# Altium PCB Awtrix Finally.pcbdoc (part 2 of 4)
Units mil, origin at the board's own origin, x right, y up, seen from the top; angles counter-clockwise.
Board outline 8820 x 2812 mil, 2 copper layers (Top Layer, Bottom Layer); 513 components, 259 nets, 1543 pads, 743 vias.
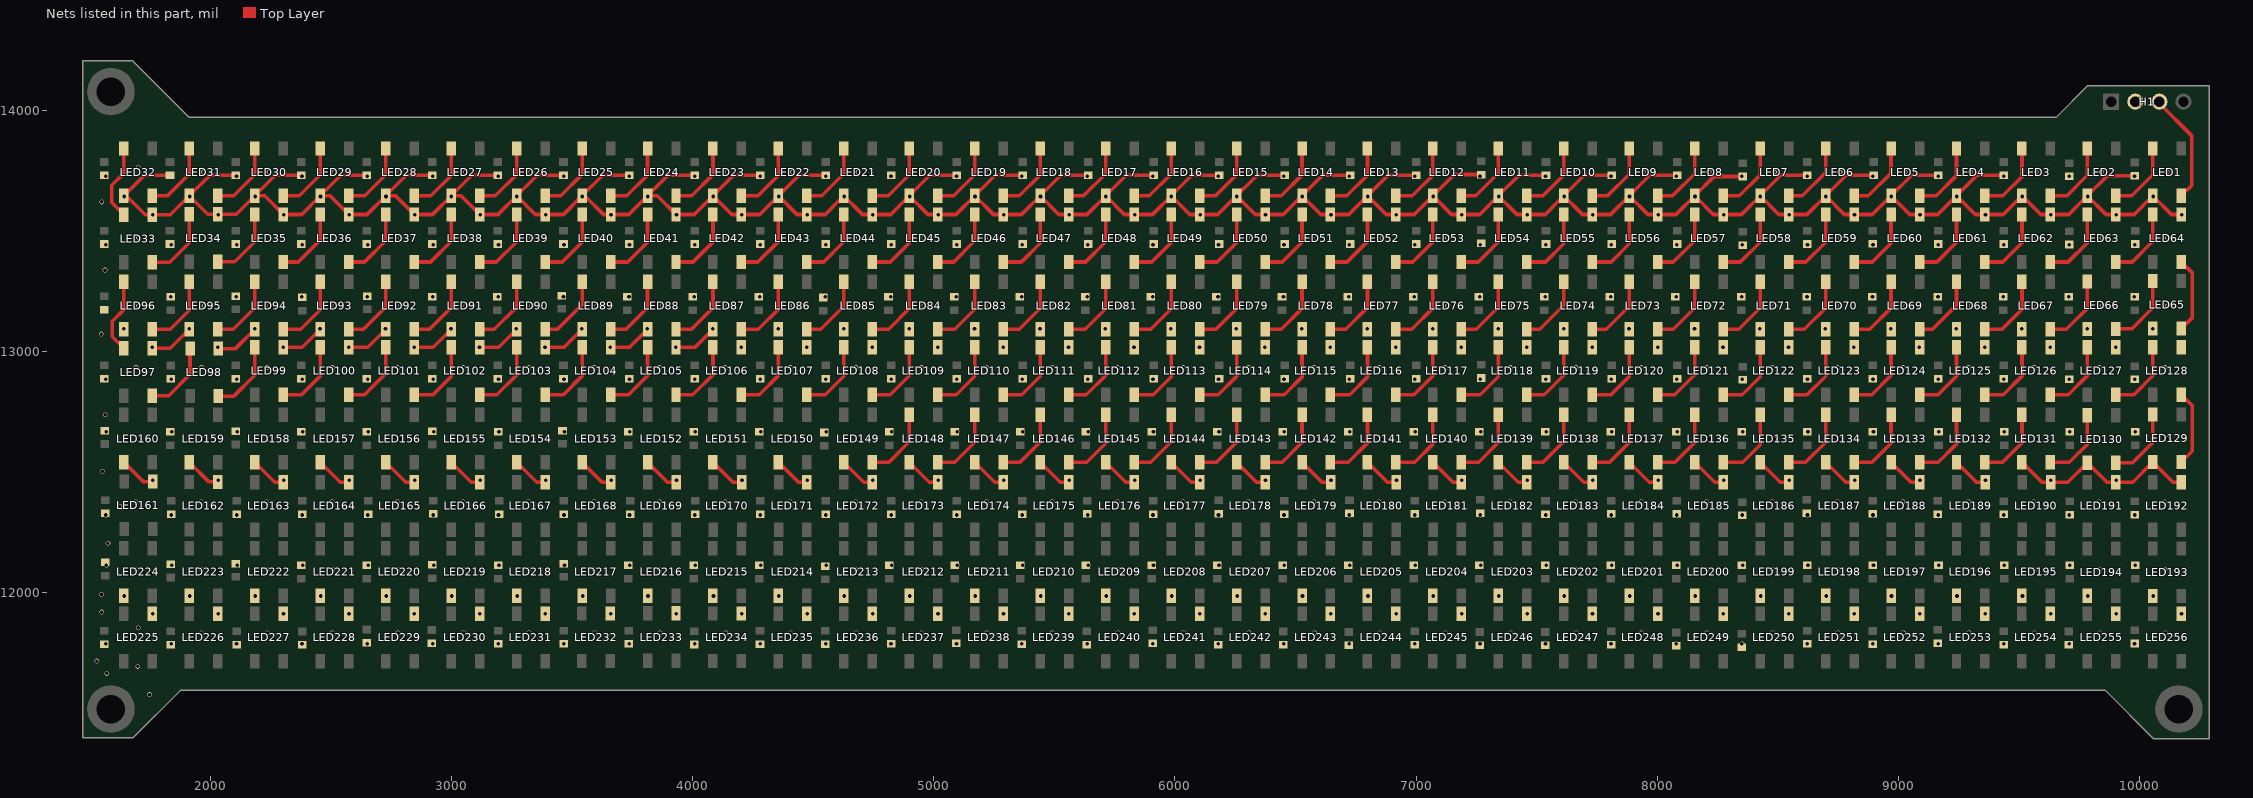
[diagram p2: the nets of this part, all layers, seen from the top]

## Via types
v1: diameter 20, hole 15, Top Layer to Bottom Layer, 743 vias

## Nets (pads, with @x,y where several pads share a name; then routed paths per layer and width w, separated by ;. In a path a pad name is that pad's centre, name@x,y a point inside that pad or via, vN(x,y) a via of type N, cw(c..) or ccw(c..) an arc to the next point about the centre after c; other vN are vias at no path point)
GND: C1.1 C2.1 C3.1 C4.1 C5.1 C6.1 C7.1 C8.1 C9.1 C10.1 C11.1 C12.1 C13.1 C14.1 C15.1 C16.1 C17.1 C18.1 C19.1 C20.1 C21.1 C22.1 C23.1 C24.1 C25.1 C26.1 C27.1 C28.1 C29.1 C30.1 C31.1 C32.1 C33.1 C34.1 C35.1 C36.1 C37.1 C38.1 C39.1 C40.1 C41.1 C42.1 C43.1 C44.1 C45.1 C46.1 C47.1 C48.1 C49.1 C50.1 C51.1 C52.1 C53.1 C54.1 C55.1 C56.1 C57.1 C58.1 C59.1 C60.1 C61.1 C62.1 C63.1 C64.1 C65.1 C66.1 C67.1 C68.1 C69.1 C70.1 C71.1 C72.1 C73.1 C74.1 C75.1 C76.1 C77.1 C78.1 C79.1 C80.1 C81.1 C82.1 C83.1 C84.1 C85.1 C86.1 C87.1 C88.1 C89.1 C90.1 C91.1 C92.1 C93.1 C94.1 C95.1 C96.1 C97.1 C98.1 C99.1 C100.1 C101.1 C102.1 C103.1 C104.1 C105.1 C106.1 C107.1 C108.1 C109.1 C110.1 C111.1 C112.1 C113.1 C114.1 C115.1 C116.1 C117.1 C118.1 C119.1 C120.1 C121.1 C122.1 C123.1 C124.1 C125.1 C126.1 C127.1 C128.1 C129.1 C130.1 C131.1 C132.1 C133.1 C134.1 C135.1 C136.1 C137.1 C138.1 C139.1 C140.1 C141.1 C142.1 C143.1 C144.1 C145.1 C146.1 C147.1 C148.1 C149.1 C150.1 C151.1 C152.1 C153.1 C154.1 C155.1 C156.1 C157.1 C158.1 C159.1 C160.1 C161.1 C162.1 C163.1 C164.1 C165.1 C166.1 C167.1 C168.1 C169.1 C170.1 C171.1 C172.1 C173.1 C174.1 C175.1 C176.1 C177.1 C178.1 C179.1 C180.1 C181.1 C182.1 C183.1 C184.1 C185.1 C186.1 C187.1 C188.1 C189.1 C190.1 C191.1 C192.1 C193.1 C194.1 C195.1 C196.1 C197.1 C198.1 C199.1 C200.1 C201.1 C202.1 C203.1 C204.1 C205.1 C206.1 C207.1 C208.1 C209.1 C210.1 C211.1 C212.1 C213.1 C214.1 C215.1 C216.1 C217.1 C218.1 C219.1 C220.1 C221.1 C222.1 C223.1 C224.1 C225.1 C226.1 C227.1 C228.1 C229.1 C230.1 C231.1 C232.1 C233.1 C234.1 C235.1 C236.1 C237.1 C238.1 C239.1 C240.1 C241.1 C242.1 C243.1 C244.1 C245.1 C246.1 C247.1 C248.1 C249.1 C250.1 C251.1 C252.1 C253.1 C254.1 C255.1 C256.1 H1.2 LED1.3 LED2.3 LED3.3 LED4.3 LED5.3 LED6.3 LED7.3 LED8.3 LED9.3 LED10.3 LED11.3 LED12.3 LED13.3 LED14.3 LED15.3 LED16.3 LED17.3 LED18.3 LED19.3 LED20.3 LED21.3 LED22.3 LED23.3 LED24.3 LED25.3 LED26.3 LED27.3 LED28.3 LED29.3 LED30.3 LED31.3 LED32.3 LED33.3 LED34.3 LED35.3 LED36.3 LED37.3 LED38.3 LED39.3 LED40.3 LED41.3 LED42.3 LED43.3 LED44.3 LED45.3 LED46.3 LED47.3 LED48.3 LED49.3 LED50.3 LED51.3 LED52.3 LED53.3 LED54.3 LED55.3 LED56.3 LED57.3 LED58.3 LED59.3 LED60.3 LED61.3 LED62.3 LED63.3 LED64.3 LED65.3 LED66.3 LED67.3 LED68.3 LED69.3 LED70.3 LED71.3 LED72.3 LED73.3 LED74.3 LED75.3 LED76.3 LED77.3 LED78.3 LED79.3 LED80.3 LED81.3 LED82.3 LED83.3 LED84.3 LED85.3 LED86.3 LED87.3 LED88.3 LED89.3 LED90.3 LED91.3 LED92.3 LED93.3 LED94.3 LED95.3 LED96.3 LED97.3 LED98.3 LED99.3 LED100.3 LED101.3 LED102.3 LED103.3 LED104.3 LED105.3 LED106.3 LED107.3 LED108.3 LED109.3 LED110.3 LED111.3 LED112.3 LED113.3 LED114.3 LED115.3 LED116.3 LED117.3 LED118.3 LED119.3 LED120.3 LED121.3 LED122.3 LED123.3 LED124.3 LED125.3 LED126.3 LED127.3 LED128.3 LED129.3 LED130.3 LED131.3 LED132.3 LED133.3 LED134.3 LED135.3 LED136.3 LED137.3 LED138.3 LED139.3 LED140.3 LED141.3 LED142.3 LED143.3 LED144.3 LED145.3 LED146.3 LED147.3 LED148.3 LED149.3 LED150.3 LED151.3 LED152.3 LED153.3 LED154.3 LED155.3 LED156.3 LED157.3 LED158.3 LED159.3 LED160.3 LED161.3 LED162.3 LED163.3 LED164.3 LED165.3 LED166.3 LED167.3 LED168.3 LED169.3 LED170.3 LED171.3 LED172.3 LED173.3 LED174.3 LED175.3 LED176.3 LED177.3 LED178.3 LED179.3 LED180.3 LED181.3 LED182.3 LED183.3 LED184.3 LED185.3 LED186.3 LED187.3 LED188.3 LED189.3 LED190.3 LED191.3 LED192.3 LED193.3 LED194.3 LED195.3 LED196.3 LED197.3 LED198.3 LED199.3 LED200.3 LED201.3 LED202.3 LED203.3 LED204.3 LED205.3 LED206.3 LED207.3 LED208.3 LED209.3 LED210.3 LED211.3 LED212.3 LED213.3 LED214.3 LED215.3 LED216.3 LED217.3 LED218.3 LED219.3 LED220.3 LED221.3 LED222.3 LED223.3 LED224.3 LED225.3 LED226.3 LED227.3 LED228.3 LED229.3 LED230.3 LED231.3 LED232.3 LED233.3 LED234.3 LED235.3 LED236.3 LED237.3 LED238.3 LED239.3 LED240.3 LED241.3 LED242.3 LED243.3 LED244.3 LED245.3 LED246.3 LED247.3 LED248.3 LED249.3 LED250.3 LED251.3 LED252.3 LED253.3 LED254.3 LED255.3 LED256.3 | length 24206.3
  Top Layer w15: LED160.3@1640.96,12541.68 1721.14,12461.5 LED161.3@1759.45,12461.5 ; LED97.3@1759.05,13014.28 1833.54,13014.28 LED95.3@1912.41,13093.15 ; C167.1@1832,13731.85 1726.22,13731.85 LED32.3@1640.94,13646.58 1650.73,13646.58 1729.59,13567.71 LED33.3@1759.05,13567.71 1833.53,13567.71 LED31.3@1912.4,13646.58 ; LED159.3@1912.41,12541.68 1994.02,12460.07 LED162.3@2030.9,12460.07 ; LED98.3@2033.1,13013 2103.71,13013 LED94.3@2183.86,13093.15 ; C227.1@2104,13731.85 1997.67,13731.85 LED31.3@1912.4,13646.58 ; LED158.3@2183.86,12541.68 2266.9,12458.64 LED163.3@2302.35,12458.64 ; LED99.3@2301.95,13018.57 2380.73,13018.57 LED93.3@2455.31,13093.15 ; C110.1@2376,13731.85 2269.13,13731.85 LED30.3@2183.85,13646.58 ; LED157.3@2455.31,12541.68 2538.35,12458.64 LED164.3@2573.8,12458.64 ; LED100.3@2573.4,13018.57 2652.18,13018.57 LED92.3@2726.76,13093.15 ; C168.1@2648.01,13731.85 2540.58,13731.85 LED29.3@2455.3,13646.58 ; LED156.3@2726.76,12541.68 2809.8,12458.64 LED165.3@2845.26,12458.64 ; LED101.3@2844.85,13018.57 2923.63,13018.57 LED91.3@2998.21,13093.15 ; C228.1@2920.01,13731.85 2812.03,13731.85 LED28.3@2726.75,13646.58 ; LED155.3@2998.21,12541.68 3081.25,12458.64 LED166.3@3116.71,12458.64 ; LED102.3@3116.31,13018.57 3195.09,13018.57 LED90.3@3269.66,13093.15 ; C111.1@3192.01,13731.85 3083.48,13731.85 LED27.3@2998.2,13646.58 ; LED154.3@3269.66,12541.68 3352.7,12458.64 LED167.3@3388.16,12458.64 ; LED103.3@3387.76,13018.57 3466.54,13018.57 LED89.3@3541.12,13093.15 ; C169.1@3464.01,13731.85 3354.93,13731.85 LED26.3@3269.65,13646.58 ; LED153.3@3541.12,12541.68 3624.16,12458.64 LED168.3@3659.61,12458.64 ; LED104.3@3659.21,13018.57 3737.99,13018.57 LED88.3@3812.57,13093.15 ; C229.1@3736.01,13731.85 3626.38,13731.85 LED25.3@3541.11,13646.58 ; LED152.3@3812.57,12541.68 3895.61,12458.64 LED169.3@3931.06,12458.64 ; LED105.3@3930.66,13018.57 4009.44,13018.57 LED87.3@4084.02,13093.15 ; C112.1@4008.01,13731.85 3897.83,13731.85 LED24.3@3812.56,13646.58 ; LED151.3@4084.02,12541.68 4167.06,12458.64 LED170.3@4202.51,12458.64 ; C170.1@4280.01,13731.85 4169.29,13731.85 LED23.3@4084.01,13646.58 ; LED150.3@4355.47,12541.68 4438.51,12458.64 LED171.3@4473.97,12458.64 ; C230.1@4552.02,13731.85 4440.74,13731.85 LED22.3@4355.46,13646.58 ; LED149.3@4626.92,12541.68 4709.96,12458.64 LED172.3@4745.42,12458.64 ; LED148.3@4898.37,12541.68 4981.41,12458.64 LED173.3@5016.87,12458.64 ; C171.1@5096.02,13731.85 4983.64,13731.85 LED20.3@4898.36,13646.58 ; LED147.3@5169.82,12541.68 5252.86,12458.64 LED174.3@5288.32,12458.64 ; C231.1@5368.02,13731.85 5255.09,13731.85 LED19.3@5169.81,13646.58 ; LED146.3@5441.28,12541.68 5524.32,12458.64 LED175.3@5559.77,12458.64 ; C187.1@5640.02,13731.85 5526.54,13731.85 LED18.3@5441.27,13646.58 ; LED145.3@5712.73,12541.68 5795.77,12458.64 LED176.3@5831.22,12458.64 ; C115.1@5912.02,13731.85 5798,13731.85 LED17.3@5712.72,13646.58 ; LED144.3@5984.18,12541.68 6067.22,12458.64 LED177.3@6102.67,12458.64 ; C173.1@6184.02,13731.85 6069.45,13731.85 LED16.3@5984.17,13646.58 ; LED143.3@6255.63,12541.68 6338.67,12458.64 LED178.3@6374.13,12458.64 ; C233.1@6456.03,13731.85 6340.9,13731.85 LED15.3@6255.62,13646.58 ; LED142.3@6527.08,12541.68 6610.12,12458.64 LED179.3@6645.58,12458.64 ; C114.1@6728.03,13731.85 6612.35,13731.85 LED14.3@6527.07,13646.58 ; LED141.3@6798.53,12541.68 6881.57,12458.64 LED180.3@6917.03,12458.64 ; C172.1@7000.03,13731.85 6883.8,13731.85 LED13.3@6798.52,13646.58 ; LED140.3@7069.99,12541.68 7153.02,12458.64 LED181.3@7188.48,12458.64 ; C232.1@7270,13734.89 7158.29,13734.89 LED12.3@7069.98,13646.58 ; LED139.3@7341.44,12541.68 7424.48,12458.64 LED182.3@7459.93,12458.64 ; C116.1@7539.03,13731.85 7426.7,13731.85 LED11.3@7341.43,13646.58 ; LED138.3@7612.89,12541.68 7695.93,12458.64 LED183.3@7731.38,12458.64 ; C174.1@7811.03,13731.85 7698.16,13731.85 LED10.3@7612.88,13646.58 ; LED137.3@7884.34,12541.68 7967.38,12458.64 LED184.3@8002.83,12458.64 ; C234.1@8083.03,13731.85 7969.61,13731.85 LED9.3@7884.33,13646.58 ; LED136.3@8155.79,12541.68 8238.83,12458.64 LED185.3@8274.29,12458.64 ; C118.1@8355.03,13726.85 8236.06,13726.85 LED8.3@8155.78,13646.58 ; LED135.3@8427.24,12541.68 8510.28,12458.64 LED186.3@8545.74,12458.64 ; C176.1@8622.04,13731.85 8512.51,13731.85 LED7.3@8427.23,13646.58 ; LED134.3@8698.69,12541.68 8781.73,12458.64 LED187.3@8817.19,12458.64 ; C236.1@8899.04,13731.85 8783.96,13731.85 LED6.3@8698.68,13646.58 ; LED133.3@8970.15,12541.68 9053.19,12458.64 LED188.3@9088.64,12458.64 ; C117.1@9166.04,13731.85 9055.41,13731.85 LED5.3@8970.14,13646.58 ; LED132.3@9241.6,12541.68 9324.64,12458.64 LED189.3@9360.09,12458.64 ; C175.1@9438.04,13731.85 9326.86,13731.85 LED4.3@9241.59,13646.58 ; LED131.3@9513.05,12541.68 9596.09,12458.64 LED190.3@9631.54,12458.64 9703.6,12458.64 LED130.3@9784.5,12539.54 9865.4,12458.64 LED191.3@9903,12458.64 9972.2,12458.64 LED129.3@10055.95,12542.4 10139.71,12458.64 LED192.3@10174.45,12458.64 ; C248.1@9980,13729.89 9867.8,13729.89 LED2.3@9784.49,13646.58 ; LED64.3@10174.04,13569.14 10133.38,13569.14 LED1.3@10055.94,13646.58 9978.51,13569.14 LED63.3@9902.59,13569.14 9861.93,13569.14 LED2.3@9784.49,13646.58 ; LED31.3@1912.4,13646.58 1988.97,13570 LED34.3@2030,13570 2107.27,13570 LED30.3@2183.85,13646.58 ; LED30.3@2183.85,13646.58 2224.51,13646.58 LED35.3@2301.95,13569.14 2377.86,13569.14 LED29.3@2455.3,13646.58 ; LED29.3@2455.3,13646.58 2495.97,13646.58 LED36.3@2573.4,13569.14 2649.31,13569.14 LED28.3@2726.75,13646.58 ; LED28.3@2726.75,13646.58 2767.42,13646.58 LED37.3@2844.85,13569.14 2920.77,13569.14 LED27.3@2998.2,13646.58 ; LED27.3@2998.2,13646.58 3038.87,13646.58 LED38.3@3116.31,13569.14 3192.22,13569.14 LED26.3@3269.65,13646.58 ; LED26.3@3269.65,13646.58 3347.09,13569.14 LED39.3@3387.76,13569.14 3463.67,13569.14 LED25.3@3541.11,13646.58 ; LED25.3@3541.11,13646.58 3552.31,13646.58 3629.75,13569.14 LED40.3@3659.21,13569.14 3735.12,13569.14 LED24.3@3812.56,13646.58 ; LED24.3@3812.56,13646.58 3853.22,13646.58 LED41.3@3930.66,13569.14 4006.57,13569.14 LED23.3@4084.01,13646.58 ; LED23.3@4084.01,13646.58 4161.44,13569.14 LED42.3@4202.11,13569.14 4278.02,13569.14 LED22.3@4355.46,13646.58 ; LED22.3@4355.46,13646.58 4432.9,13569.14 LED43.3@4473.56,13569.14 4549.48,13569.14 LED21.3@4626.91,13646.58 4704.35,13569.14 LED44.3@4745.01,13569.14 4820.93,13569.14 LED20.3@4898.36,13646.58 ; LED20.3@4898.36,13646.58 4975.8,13569.14 LED45.3@5016.47,13569.14 5092.38,13569.14 LED19.3@5169.81,13646.58 ; LED19.3@5169.81,13646.58 5247.25,13569.14 LED46.3@5287.92,13569.14 5363.83,13569.14 LED18.3@5441.27,13646.58 ; LED18.3@5441.27,13646.58 5518.7,13569.14 LED47.3@5559.37,13569.14 5635.28,13569.14 LED17.3@5712.72,13646.58 ; LED17.3@5712.72,13646.58 5790.15,13569.14 LED48.3@5830.82,13569.14 5906.73,13569.14 LED16.3@5984.17,13646.58 ; LED16.3@5984.17,13646.58 6061.61,13569.14 LED49.3@6102.27,13569.14 6178.18,13569.14 LED15.3@6255.62,13646.58 ; LED15.3@6255.62,13646.58 6333.06,13569.14 LED50.3@6373.72,13569.14 6449.64,13569.14 LED14.3@6527.07,13646.58 ; LED14.3@6527.07,13646.58 6604.51,13569.14 LED51.3@6645.18,13569.14 6721.09,13569.14 LED13.3@6798.52,13646.58 ; LED13.3@6798.52,13646.58 6875.96,13569.14 LED52.3@6916.63,13569.14 6992.54,13569.14 LED12.3@7069.98,13646.58 ; LED12.3@7069.98,13646.58 7147.41,13569.14 LED53.3@7188.08,13569.14 7263.99,13569.14 LED11.3@7341.43,13646.58 ; LED11.3@7341.43,13646.58 7418.86,13569.14 LED54.3@7459.53,13569.14 7535.44,13569.14 LED10.3@7612.88,13646.58 ; LED10.3@7612.88,13646.58 7690.31,13569.14 LED55.3@7730.98,13569.14 7806.89,13569.14 LED9.3@7884.33,13646.58 ; LED9.3@7884.33,13646.58 7961.77,13569.14 LED56.3@8002.43,13569.14 8078.34,13569.14 LED8.3@8155.78,13646.58 ; LED8.3@8155.78,13646.58 8233.22,13569.14 LED57.3@8273.88,13569.14 8349.8,13569.14 LED7.3@8427.23,13646.58 ; LED7.3@8427.23,13646.58 8504.67,13569.14 LED58.3@8545.34,13569.14 8621.25,13569.14 LED6.3@8698.68,13646.58 ; LED6.3@8698.68,13646.58 8776.12,13569.14 LED59.3@8816.79,13569.14 8892.7,13569.14 LED5.3@8970.14,13646.58 ; LED5.3@8970.14,13646.58 9047.57,13569.14 LED60.3@9088.24,13569.14 9164.15,13569.14 LED4.3@9241.59,13646.58 ; LED4.3@9241.59,13646.58 9319.02,13569.14 LED61.3@9359.69,13569.14 9435.6,13569.14 LED3.3@9513.04,13646.58 9590.47,13569.14 LED62.3@9631.14,13569.14 9707.05,13569.14 LED2.3@9784.49,13646.58
  other v1: 1746.99,11577.97 1569.99,11665.97 1697.99,11694.97 1527.99,11716.97 1564.99,11788.97 1836.44,11788.97 2107.9,11788.97 2379.35,11788.97 2650.8,11788.97 2922.25,11788.97 3193.7,11788.97 3465.15,11788.97 3736.61,11788.97 4008.06,11788.97 4279.51,11788.97 4550.96,11788.97 4822.41,11788.97 5093.86,11788.97 5365.31,11788.97 5636.77,11788.97 5908.22,11788.97 6179.67,11788.97 6451.12,11788.97 6722.57,11788.97 6994.02,11788.97 7265.47,11788.97 7536.93,11788.97 7808.38,11788.97 8079.83,11788.97 8351.28,11788.97 8622.73,11788.97 8894.18,11788.97 9165.64,11788.97 9437.09,11788.97 9708.54,11788.97 9979.99,11788.97 1963.7,11833.38 2235.15,11833.38 2506.6,11833.38 2778.05,11833.38 3049.5,11833.38 3320.95,11833.38 3592.41,11833.38 3863.86,11833.38 4135.31,11833.38 4406.76,11833.38 4678.21,11833.38 4949.66,11833.38 5221.11,11833.38 5492.57,11833.38 5764.02,11833.38 6035.47,11833.38 6306.92,11833.38 6578.37,11833.38 6849.82,11833.38 7121.27,11833.38 7392.73,11833.38 7664.18,11833.38 7935.63,11833.38 8207.08,11833.38 8478.53,11833.38 8749.98,11833.38 9021.44,11833.38 9292.89,11833.38 9564.34,11833.38 9835.79,11833.38 10107.24,11833.38 1700,11855 1759.99,11912.97 2031.44,11912.97 2302.9,11912.97 2574.35,11912.97 2845.8,11912.97 3117.25,11912.97 3388.7,11912.97 3660.15,11912.97 3931.61,11912.97 4203.06,11912.97 4474.51,11912.97 4745.96,11912.97 5017.41,11912.97 5288.86,11912.97 5560.31,11912.97 5831.77,11912.97 6103.22,11912.97 6374.67,11912.97 6646.12,11912.97 6917.57,11912.97 7189.02,11912.97 7460.47,11912.97 7731.93,11912.97 8003.38,11912.97 8274.83,11912.97 8546.28,11912.97 8817.73,11912.97 9089.18,11912.97 9360.64,11912.97 9632.09,11912.97 9903.54,11912.97 10174.99,11912.97 1549.06,11920.01 1642.99,11986.97 1914.44,11986.97 2185.9,11986.97 2457.35,11986.97 2728.8,11986.97 3000.25,11986.97 3271.7,11986.97 3543.15,11986.97 3814.61,11986.97 4086.06,11986.97 4357.51,11986.97 4628.96,11986.97 4900.41,11986.97 5171.86,11986.97 5443.31,11986.97 5714.77,11986.97 5986.22,11986.97 6257.67,11986.97 6529.12,11986.97 6800.57,11986.97 7072.02,11986.97 7343.47,11986.97 7614.93,11986.97 7886.38,11986.97 8157.83,11986.97 8429.28,11986.97 8700.73,11986.97 8972.18,11986.97 9243.64,11986.97 9515.09,11986.97 9786.54,11986.97 10057.99,11986.97 1547.99,11992.97 1690.99,12097.97 1962.44,12097.97 2233.9,12097.97 2505.35,12097.97 2776.8,12097.97 3048.25,12097.97 3319.7,12097.97 3591.15,12097.97 3862.61,12097.97 4134.06,12097.97 4405.51,12097.97 4676.96,12097.97 4948.41,12097.97 5219.86,12097.97 5491.31,12097.97 5762.77,12097.97 6034.22,12097.97 6305.67,12097.97 6577.12,12097.97 6848.57,12097.97 7120.02,12097.97 7391.47,12097.97 7662.93,12097.97 7934.38,12097.97 8205.83,12097.97 8477.28,12097.97 8748.73,12097.97 9020.18,12097.97 9291.64,12097.97 9563.09,12097.97 9834.54,12097.97 10105.99,12097.97 1567.99,12114.97 1839.44,12114.97 2110.9,12114.97 2382.35,12114.97 2653.8,12114.97 2925.25,12114.97 3196.7,12114.97 3468.15,12114.97 3739.61,12114.97 4011.06,12114.97 4282.51,12114.97 4553.96,12114.97 4825.41,12114.97 5096.86,12114.97 5368.31,12114.97 5639.77,12114.97 5911.22,12114.97 6182.67,12114.97 6454.12,12114.97 6725.57,12114.97 6997.02,12114.97 7268.47,12114.97 7539.93,12114.97 7811.38,12114.97 8082.83,12114.97 8354.28,12114.97 8625.73,12114.97 8897.18,12114.97 9168.64,12114.97 9440.09,12114.97 9711.54,12114.97 9982.99,12114.97 1574.55,12205.38 1565.99,12322.97 1837.44,12322.97 2108.9,12322.97 2380.35,12322.97 2651.8,12322.97 2923.25,12322.97 3194.7,12322.97 3466.15,12322.97 3737.61,12322.97 4009.06,12322.97 4280.51,12322.97 4551.96,12322.97 4823.41,12322.97 5094.86,12322.97 5366.31,12322.97 5637.77,12322.97 5909.22,12322.97 6180.67,12322.97 6452.12,12322.97 6723.57,12322.97 6995.02,12322.97 7266.47,12322.97 7537.93,12322.97 7809.38,12322.97 8080.83,12322.97 8352.28,12322.97 8623.73,12322.97 8895.18,12322.97 9166.64,12322.97 9438.09,12322.97 9709.54,12322.97 9980.99,12322.97 1624.28,12358.62 1690.2,12376.89 1961.65,12376.89 2233.1,12376.89 2504.56,12376.89 2776.01,12376.89 3047.46,12376.89 3318.91,12376.89 3590.36,12376.89 3861.81,12376.89 4133.27,12376.89 4404.72,12376.89 4676.17,12376.89 4947.62,12376.89 5219.07,12376.89 5490.52,12376.89 5761.97,12376.89 6033.43,12376.89 6304.88,12376.89 6576.33,12376.89 6847.78,12376.89 7119.23,12376.89 7390.68,12376.89 7662.13,12376.89 7933.59,12376.89 8205.04,12376.89 8476.49,12376.89 8747.94,12376.89 9019.39,12376.89 9290.84,12376.89 9562.3,12376.89 9833.75,12376.89 10105.2,12376.89 1761.15,12466.62 2032.6,12466.62 2304.05,12466.62 2575.5,12466.62 2846.96,12466.62 3118.41,12466.62 3389.86,12466.62 3661.31,12466.62 3932.76,12466.62 4204.21,12466.62 4475.67,12466.62 4747.12,12466.62 5018.57,12466.62 5290.02,12466.62 5561.47,12466.62 5832.92,12466.62 6104.37,12466.62 6375.83,12466.62 6647.28,12466.62 6918.73,12466.62 7190.18,12466.62 7461.63,12466.62 7733.08,12466.62 8004.53,12466.62 8275.99,12466.62 8547.44,12466.62 8818.89,12466.62 9090.34,12466.62 9361.79,12466.62 9633.24,12466.62 9904.7,12466.62 1552.28,12504.28 1699.99,12637.97 1971.44,12637.97 2242.9,12637.97 2514.35,12637.97 2785.8,12637.97 3057.25,12637.97 3328.7,12637.97 3600.15,12637.97 3871.61,12637.97 4143.06,12637.97 4414.51,12637.97 4685.96,12637.97 4957.41,12637.97 5228.86,12637.97 5500.31,12637.97 5771.77,12637.97 6043.22,12637.97 6314.67,12637.97 6586.12,12637.97 6857.57,12637.97 7129.02,12637.97 7400.47,12637.97 7671.93,12637.97 7943.38,12637.97 8214.83,12637.97 8486.28,12637.97 8757.73,12637.97 9029.18,12637.97 9300.64,12637.97 9572.09,12637.97 9843.54,12637.97 10114.99,12637.97 1567.99,12667.97 1839.44,12667.97 2110.9,12667.97 2382.35,12667.97 2653.8,12667.97 2925.25,12667.97 3196.7,12667.97 3468.15,12667.97 3739.61,12667.97 4011.06,12667.97 4282.51,12667.97 4553.96,12667.97 4825.41,12667.97 5096.86,12667.97 5368.31,12667.97 5639.77,12667.97 5911.22,12667.97 6182.67,12667.97 6454.12,12667.97 6725.57,12667.97 6997.02,12667.97 7268.47,12667.97 7539.93,12667.97 7811.38,12667.97 8082.83,12667.97 8354.28,12667.97 8625.73,12667.97 8897.18,12667.97 9168.64,12667.97 9440.09,12667.97 9711.54,12667.97 9982.99,12667.97 1563.24,12738.97 1565.99,12885.97 1837.44,12885.97 2108.9,12885.97 2380.35,12885.97 2651.8,12885.97 2923.25,12885.97 3194.7,12885.97 3466.15,12885.97 3737.61,12885.97 4009.06,12885.97 4280.51,12885.97 4551.96,12885.97 4823.41,12885.97 5094.86,12885.97 5366.31,12885.97 5637.77,12885.97 5909.22,12885.97 6180.67,12885.97 6452.12,12885.97 6723.57,12885.97 6995.02,12885.97 7266.47,12885.97 7537.93,12885.97 7809.38,12885.97 8080.83,12885.97 8352.28,12885.97 8623.73,12885.97 8895.18,12885.97 9166.64,12885.97 9438.09,12885.97 9709.54,12885.97 9980.99,12885.97 1690.98,12934.33 1962.44,12934.33 2233.89,12934.33 2505.34,12934.33 2776.79,12934.33 3048.24,12934.33 3319.69,12934.33 3591.15,12934.33 3862.6,12934.33 4134.05,12934.33 4405.5,12934.33 4676.95,12934.33 4948.4,12934.33 5219.85,12934.33 5491.31,12934.33 5762.76,12934.33 6034.21,12934.33 6305.66,12934.33 6577.11,12934.33 6848.56,12934.33 7120.02,12934.33 7391.47,12934.33 7662.92,12934.33 7934.37,12934.33 8205.82,12934.33 8477.27,12934.33 8748.72,12934.33 9020.18,12934.33 9291.63,12934.33 9563.08,12934.33 9834.53,12934.33 10105.98,12934.33 1758.44,13017.97 2029.9,13017.97 2301.35,13017.97 2572.8,13017.97 2844.25,13017.97 3115.7,13017.97 3387.15,13017.97 3658.61,13017.97 3930.06,13017.97 4201.51,13017.97 4472.96,13017.97 4744.41,13017.97 5015.86,13017.97 5287.31,13017.97 5558.77,13017.97 5830.22,13017.97 6101.67,13017.97 6373.12,13017.97 6644.57,13017.97 6916.02,13017.97 7187.47,13017.97 7458.93,13017.97 7730.38,13017.97 8001.83,13017.97 8273.28,13017.97 8544.73,13017.97 8816.18,13017.97 9087.64,13017.97 9359.09,13017.97 9630.54,13017.97 9901.99,13017.97 1546.99,13072.97 1639.99,13095.97 1911.44,13095.97 2182.9,13095.97 2454.35,13095.97 2725.8,13095.97 2997.25,13095.97 3268.7,13095.97 3540.15,13095.97 3811.61,13095.97 4083.06,13095.97 4354.51,13095.97 4625.96,13095.97 4897.41,13095.97 5168.86,13095.97 5440.31,13095.97 5711.77,13095.97 5983.22,13095.97 6254.67,13095.97 6526.12,13095.97 6797.57,13095.97 7069.02,13095.97 7340.47,13095.97 7611.93,13095.97 7883.38,13095.97 8154.83,13095.97 8426.28,13095.97 8697.73,13095.97 8969.18,13095.97 9240.64,13095.97 9512.09,13095.97 9783.54,13095.97 10054.99,13095.97 1701.99,13190.97 1973.44,13190.97 2244.9,13190.97 2516.35,13190.97 2787.8,13190.97 3059.25,13190.97 3330.7,13190.97 3602.15,13190.97 3873.61,13190.97 4145.06,13190.97 4416.51,13190.97 4687.96,13190.97 4959.41,13190.97 5230.86,13190.97 5502.31,13190.97 5773.77,13190.97 6045.22,13190.97 6316.67,13190.97 6588.12,13190.97 6859.57,13190.97 7131.02,13190.97 7402.47,13190.97 7673.93,13190.97 7945.38,13190.97 8216.83,13190.97 8488.28,13190.97 8759.73,13190.97 9031.18,13190.97 9302.64,13190.97 9574.09,13190.97 9845.54,13190.97 10116.99,13190.97 1835.44,13227.97 2106.9,13227.97 2378.35,13227.97 2649.8,13227.97 2921.25,13227.97 3192.7,13227.97 3464.15,13227.97 3735.61,13227.97 4007.06,13227.97 4278.51,13227.97 4549.96,13227.97 4821.41,13227.97 5092.86,13227.97 5364.31,13227.97 5635.77,13227.97 5907.22,13227.97 6178.67,13227.97 6450.12,13227.97 6721.57,13227.97 6993.02,13227.97 7264.47,13227.97 7535.93,13227.97 7807.38,13227.97 8078.83,13227.97 8350.28,13227.97 8621.73,13227.97 8893.18,13227.97 9164.64,13227.97 9436.09,13227.97 9707.54,13227.97 9978.99,13227.97 1562.51,13338.41 1565.99,13443.97 1837.44,13443.97 2108.9,13443.97 2380.35,13443.97 2651.8,13443.97 2923.25,13443.97 3194.7,13443.97 3466.15,13443.97 3737.61,13443.97 4009.06,13443.97 4280.51,13443.97 4551.96,13443.97 4823.41,13443.97 5094.86,13443.97 5366.31,13443.97 5637.77,13443.97 5909.22,13443.97 6180.67,13443.97 6452.12,13443.97 6723.57,13443.97 6995.02,13443.97 7266.47,13443.97 7537.93,13443.97 7809.38,13443.97 8080.83,13443.97 8352.28,13443.97 8623.73,13443.97 8895.18,13443.97 9166.64,13443.97 9438.09,13443.97 9709.54,13443.97 9980.99,13443.97 1701.99,13472.97 2787.8,13472.97 3059.25,13472.97 3330.7,13472.97 3602.15,13472.97 3873.61,13472.97 4145.06,13472.97 4416.51,13472.97 4687.96,13472.97 4959.41,13472.97 5230.86,13472.97 5502.31,13472.97 5773.77,13472.97 6045.22,13472.97 6316.67,13472.97 6588.12,13472.97 6859.57,13472.97 7131.02,13472.97 7402.47,13472.97 7673.93,13472.97 7945.38,13472.97 8216.83,13472.97 8488.28,13472.97 8759.73,13472.97 9031.18,13472.97 9302.64,13472.97 9574.09,13472.97 9845.54,13472.97 10116.99,13472.97 1760.99,13567.97 2032.44,13567.97 2303.9,13567.97 2575.35,13567.97 2846.8,13567.97 3118.25,13567.97 3389.7,13567.97 3661.15,13567.97 3932.61,13567.97 4204.06,13567.97 4475.51,13567.97 4746.96,13567.97 5018.41,13567.97 5289.86,13567.97 5561.31,13567.97 5832.77,13567.97 6104.22,13567.97 6375.67,13567.97 6647.12,13567.97 6918.57,13567.97 7190.02,13567.97 7461.47,13567.97 7732.93,13567.97 8004.38,13567.97 8275.83,13567.97 8547.28,13567.97 8818.73,13567.97 9090.18,13567.97 9361.64,13567.97 9633.09,13567.97 9904.54,13567.97 10175.99,13567.97 1549.28,13621.43 1641.99,13643.97 1913.44,13643.97 2184.9,13643.97 2456.35,13643.97 2727.8,13643.97 2999.25,13643.97 3270.7,13643.97 3542.15,13643.97 3813.61,13643.97 4085.06,13643.97 4356.51,13643.97 4627.96,13643.97 4899.41,13643.97 5170.86,13643.97 5442.31,13643.97 5713.77,13643.97 5985.22,13643.97 6256.67,13643.97 6528.12,13643.97 6799.57,13643.97 7071.02,13643.97 7342.47,13643.97 7613.93,13643.97 7885.38,13643.97 8156.83,13643.97 8428.28,13643.97 8699.73,13643.97 8971.18,13643.97 9242.64,13643.97 9514.09,13643.97 9785.54,13643.97 10056.99,13643.97 1564.99,13727.97 2107.9,13727.97 2379.35,13727.97 2650.8,13727.97 2922.25,13727.97 3193.7,13727.97 3465.15,13727.97 3736.61,13727.97 4008.06,13727.97 4279.51,13727.97 4550.96,13727.97 4822.41,13727.97 5093.86,13727.97 5365.31,13727.97 5636.77,13727.97 5908.22,13727.97 6179.67,13727.97 6451.12,13727.97 6722.57,13727.97 6994.02,13727.97 7265.47,13727.97 7536.93,13727.97 7808.38,13727.97 8079.83,13727.97 8351.28,13727.97 8622.73,13727.97 8894.18,13727.97 9165.64,13727.97 9437.09,13727.97 9708.54,13727.97 9979.99,13727.97 1971.44,13744.97 2242.9,13744.97 2514.35,13744.97 2785.8,13744.97 3057.25,13744.97 3328.7,13744.97 3600.15,13744.97 3871.61,13744.97 4143.06,13744.97 4414.51,13744.97 4685.96,13744.97 4957.41,13744.97 5228.86,13744.97 5500.31,13744.97 5771.77,13744.97 6043.22,13744.97 6314.67,13744.97 6586.12,13744.97 6857.57,13744.97 7129.02,13744.97 7400.47,13744.97 7671.93,13744.97 7943.38,13744.97 8214.83,13744.97 8486.28,13744.97 8757.73,13744.97 9029.18,13744.97 9300.64,13744.97 9572.09,13744.97 9843.54,13744.97 10114.99,13744.97 1699.99,13765.37
IN: H1.3 LED1.4 | length 464.6
  Top Layer w15: H1.3@10083,14037 10083,14030 10218,13895 10218,13690.53 LED1.4@10174.04,13646.58
LED2_4: LED1.2 LED2.4 | length 299
  Top Layer w15: LED2.4@9902.59,13646.58 9968.58,13646.58 10055.94,13733.94 LED1.2@10055.94,13843.43
LED3_4: LED2.2 LED3.4 | length 300.5
  Top Layer w15: LED3.4@9631.14,13646.58 9699.58,13646.58 9784.49,13731.49 LED2.2@9784.49,13843.43
LED4_4: LED3.2 LED4.4 | length 303.7
  Top Layer w15: LED4.4@9359.69,13646.58 9433.58,13646.58 9513.04,13726.04 LED3.2@9513.04,13843.43
LED5_4: LED4.2 LED5.4 | length 301
  Top Layer w15: LED5.4@9088.24,13646.58 9157.58,13646.58 9241.59,13730.59 LED4.2@9241.59,13843.43
LED6_4: LED5.2 LED6.4 | length 295.1
  Top Layer w15: LED6.4@8816.78,13646.58 8876.13,13646.58 8970.14,13740.58 LED5.2@8970.14,13843.43
LED7_4: LED6.2 LED7.4 | length 293.3
  Top Layer w15: LED7.4@8545.33,13646.58 8601.58,13646.58 8698.68,13743.68 LED6.2@8698.68,13843.43
LED8_4: LED7.2 LED8.4 | length 299.5
  Top Layer w15: LED8.4@8273.88,13646.58 8340.69,13646.58 8427.23,13733.12 LED7.2@8427.23,13843.43
LED9_4: LED8.2 LED9.4 | length 296.2
  Top Layer w15: LED9.4@8002.43,13646.58 8063.58,13646.58 8155.78,13738.78 LED8.2@8155.78,13843.43
LED10_4: LED9.2 LED10.4 | length 297.5
  Top Layer w15: LED10.4@7730.98,13646.58 7794.31,13646.58 7884.33,13736.59 LED9.2@7884.33,13843.43
LED11_4: LED10.2 LED11.4 | length 299.6
  Top Layer w15: LED11.4@7459.53,13646.58 7526.58,13646.58 7612.88,13732.88 LED10.2@7612.88,13843.43
LED12_4: LED11.2 LED12.4 | length 295.2
  Top Layer w15: LED12.4@7188.07,13646.58 7247.58,13646.58 7341.43,13740.43 LED11.2@7341.43,13843.43
LED13_4: LED12.2 LED13.4 | length 300.2
  Top Layer w15: LED13.4@6916.62,13646.58 6984.58,13646.58 7069.98,13731.98 LED12.2@7069.98,13843.43
LED14_4: LED13.2 LED14.4 | length 300.2
  Top Layer w15: LED14.4@6645.17,13646.58 6713.13,13646.58 6798.52,13731.97 LED13.2@6798.52,13843.43
LED15_4: LED14.2 LED15.4 | length 299.6
  Top Layer w15: LED15.4@6373.72,13646.58 6440.72,13646.58 6527.07,13732.93 LED14.2@6527.07,13843.43
LED16_4: LED15.2 LED16.4 | length 299.2
  Top Layer w15: LED16.4@6102.27,13646.58 6168.58,13646.58 6255.62,13733.62 LED15.2@6255.62,13843.43
LED17_4: LED16.2 LED17.4 | length 297.1
  Top Layer w15: LED17.4@5830.82,13646.58 5893.58,13646.58 5984.17,13737.17 LED16.2@5984.17,13843.43
LED18_4: LED17.2 LED18.4 | length 296.2
  Top Layer w15: LED18.4@5559.37,13646.58 5620.58,13646.58 5712.72,13738.72 LED17.2@5712.72,13843.43
LED19_4: LED18.2 LED19.4 | length 299.4
  Top Layer w15: LED19.4@5287.91,13646.58 5354.58,13646.58 5441.27,13733.27 LED18.2@5441.27,13843.43
LED20_4: LED19.2 LED20.4 | length 299.1
  Top Layer w15: LED20.4@5016.46,13646.58 5082.58,13646.58 5169.81,13733.81 LED19.2@5169.81,13843.43
LED21_4: LED20.2 LED21.4 | length 298.8
  Top Layer w15: LED21.4@4745.01,13646.58 4810.58,13646.58 4898.36,13734.36 LED20.2@4898.36,13843.43
LED22_4: LED21.2 LED22.4 | length 296.7
  Top Layer w15: LED22.4@4473.56,13646.58 4535.58,13646.58 4626.91,13737.91 LED21.2@4626.91,13843.43
LED23_4: LED22.2 LED23.4 | length 300.5
  Top Layer w15: LED23.4@4202.11,13646.58 4270.58,13646.58 4355.46,13731.46 LED22.2@4355.46,13843.43
LED24_4: LED23.2 LED24.4 | length 298.4
  Top Layer w15: LED24.4@3930.66,13646.58 3995.58,13646.58 4084.01,13735.01 LED23.2@4084.01,13843.43
LED25_4: LED24.2 LED25.4 | length 299.8
  Top Layer w15: LED25.4@3659.21,13646.58 3726.58,13646.58 3812.56,13732.56 LED24.2@3812.56,13843.43
LED26_4: LED25.2 LED26.4 | length 298.4
  Top Layer w15: LED26.4@3387.75,13646.58 3452.72,13646.58 3541.11,13734.96 LED25.2@3541.11,13843.43
LED27_4: LED26.2 LED27.4 | length 298.4
  Top Layer w15: LED27.4@3116.3,13646.58 3181.23,13646.58 3269.65,13735 LED26.2@3269.65,13843.43
LED28_4: LED27.2 LED28.4 | length 300.6
  Top Layer w15: LED28.4@2844.85,13646.58 2913.58,13646.58 2998.2,13731.2 LED27.2@2998.2,13843.43
LED29_4: LED28.2 LED29.4 | length 299.1
  Top Layer w15: LED29.4@2573.4,13646.58 2639.58,13646.58 2726.75,13733.75 LED28.2@2726.75,13843.43
LED30_4: LED29.2 LED30.4 | length 298.8
  Top Layer w15: LED30.4@2301.95,13646.58 2367.58,13646.58 2455.3,13734.3 LED29.2@2455.3,13843.43
LED31_4: LED30.2 LED31.4 | length 299.1
  Top Layer w15: LED31.4@2030.5,13646.58 2096.58,13646.58 2183.85,13733.85 LED30.2@2183.85,13843.43
LED32_4: LED31.2 LED32.4 | length 297.1
  Top Layer w15: LED32.4@1759.05,13646.58 1821.69,13646.58 1912.4,13737.29 LED31.2@1912.4,13843.43
LED33_4: LED32.2 LED33.4 | length 317.9
  Top Layer w15: LED33.4@1640.95,13567.71 1590,13618.66 1590,13690 1640.94,13740.94 LED32.2@1640.94,13843.43
LED34_4: LED33.2 LED34.4 | length 304.5
  Top Layer w15: LED33.2@1759.05,13370.86 1830.86,13370.86 1911.9,13451.9 LED34.4@1911.9,13570
LED35_4: LED34.2 LED35.4 | length 301.1
  Top Layer w15: LED34.2@2030,13373.15 2100.7,13373.15 2183.85,13456.3 LED35.4@2183.85,13569.14
LED36_4: LED35.2 LED36.4 | length 296.9
  Top Layer w15: LED35.2@2301.95,13372.29 2364.29,13372.29 2455.3,13463.3 LED36.4@2455.3,13569.14
LED37_4: LED36.2 LED37.4 | length 298.4
  Top Layer w15: LED36.2@2573.4,13372.29 2638.29,13372.29 2726.75,13460.75 LED37.4@2726.75,13569.14
LED38_4: LED37.2 LED38.4 | length 299.9
  Top Layer w15: LED37.2@2844.85,13372.29 2912.29,13372.29 2998.21,13458.21 LED38.4@2998.21,13569.14
LED39_4: LED38.2 LED39.4 | length 300.8
  Top Layer w15: LED38.2@3116.31,13372.29 3185.29,13372.29 3269.66,13456.66 LED39.4@3269.66,13569.14
LED40_4: LED39.2 LED40.4 | length 302.3
  Top Layer w15: LED39.2@3387.76,13372.29 3459.29,13372.29 3541.11,13454.11 LED40.4@3541.11,13569.14
LED41_4: LED40.2 LED41.4 | length 302
  Top Layer w15: LED40.2@3659.21,13372.29 3730.29,13372.29 3812.56,13454.56 LED41.4@3812.56,13569.14
LED42_4: LED41.2 LED42.4 | length 301.7
  Top Layer w15: LED41.2@3930.66,13372.29 4001.29,13372.29 4084.01,13455.01 LED42.4@4084.01,13569.14
LED43_4: LED42.2 LED43.4 | length 300.3
  Top Layer w15: LED42.2@4202.11,13372.29 4270.29,13372.29 4355.46,13457.46 LED43.4@4355.46,13569.14
LED44_4: LED43.2 LED44.4 | length 301.2
  Top Layer w15: LED43.2@4473.56,13372.29 4543.29,13372.29 4626.91,13455.91 LED44.4@4626.91,13569.14
LED45_4: LED44.2 LED45.4 | length 304.2
  Top Layer w15: LED44.2@4745.01,13372.29 4819.85,13372.29 4898.37,13450.81 LED45.4@4898.37,13569.14
LED46_4: LED45.2 LED46.4 | length 298.9
  Top Layer w15: LED45.2@5016.47,13372.29 5082.29,13372.29 5169.82,13459.82 LED46.4@5169.82,13569.14
LED47_4: LED46.2 LED47.4 | length 304.5
  Top Layer w15: LED46.2@5287.92,13372.29 5363.29,13372.29 5441.27,13450.27 LED47.4@5441.27,13569.14
LED48_4: LED47.2 LED48.4 | length 301.3
  Top Layer w15: LED47.2@5559.37,13372.29 5629.29,13372.29 5712.72,13455.72 LED48.4@5712.72,13569.14
LED49_4: LED48.2 LED49.4 | length 302.8
  Top Layer w15: LED48.2@5830.82,13372.29 5903.29,13372.29 5984.17,13453.17 LED49.4@5984.17,13569.14
LED50_4: LED49.2 LED50.4 | length 303.5
  Top Layer w15: LED49.2@6102.27,13372.29 6175.91,13372.29 6255.62,13452 LED50.4@6255.62,13569.14
LED51_4: LED50.2 LED51.4 | length 302.3
  Top Layer w15: LED50.2@6373.72,13372.29 6445.29,13372.29 6527.07,13454.08 LED51.4@6527.07,13569.14
LED52_4: LED51.2 LED52.4 | length 300.3
  Top Layer w15: LED51.2@6645.18,13372.29 6713.29,13372.29 6798.53,13457.53 LED52.4@6798.53,13569.14
LED53_4: LED52.2 LED53.4 | length 301.2
  Top Layer w15: LED52.2@6916.63,13372.29 6986.29,13372.29 7069.98,13455.98 LED53.4@7069.98,13569.14
LED54_4: LED53.2 LED54.4 | length 301.5
  Top Layer w15: LED53.2@7188.08,13372.29 7258.29,13372.29 7341.43,13455.43 LED54.4@7341.43,13569.14
LED55_4: LED54.2 LED55.4 | length 305.9
  Top Layer w15: LED54.2@7459.53,13372.29 7537.29,13372.29 7612.88,13447.88 LED55.4@7612.88,13569.14
LED56_2: LED56.2 LED57.4 | length 298.4
  Top Layer w15: LED56.2@8002.43,13372.29 8067.29,13372.29 8155.78,13460.78 LED57.4@8155.78,13569.14
LED56_4: LED55.2 LED56.4 | length 306.2
  Top Layer w15: LED55.2@7730.98,13372.29 7809.29,13372.29 7884.33,13447.33 LED56.4@7884.33,13569.14
LED58_4: LED57.2 LED58.4 | length 302.2
  Top Layer w15: LED57.2@8273.88,13372.29 8345.29,13372.29 8427.24,13454.24 LED58.4@8427.24,13569.14
LED59_4: LED58.2 LED59.4 | length 301.9
  Top Layer w15: LED58.2@8545.34,13372.29 8616.29,13372.29 8698.69,13454.69 LED59.4@8698.69,13569.14
LED60_4: LED59.2 LED60.4 | length 304.6
  Top Layer w15: LED59.2@8816.79,13372.29 8892.29,13372.29 8970.14,13450.14 LED60.4@8970.14,13569.14
LED61_4: LED60.2 LED61.4 | length 302.6
  Top Layer w15: LED60.2@9088.24,13372.29 9160.29,13372.29 9241.59,13453.59 LED61.4@9241.59,13569.14
LED62_4: LED61.2 LED62.4 | length 303.5
  Top Layer w15: LED61.2@9359.69,13372.29 9433.29,13372.29 9513.04,13452.04 LED62.4@9513.04,13569.14
LED63_4: LED62.2 LED63.4 | length 303.2
  Top Layer w15: LED62.2@9631.14,13372.29 9704.29,13372.29 9784.49,13452.49 LED63.4@9784.49,13569.14
LED64_2: LED64.2 LED65.4 | length 314.4
  Top Layer w15: LED65.4@10174.05,13096 10220,13141.95 10220,13326.33 LED64.2@10174.04,13372.29
LED64_4: LED63.2 LED64.4 | length 300
  Top Layer w15: LED63.2@9902.59,13372.29 9970.29,13372.29 10055.94,13457.94 LED64.4@10055.94,13569.14
LED65_2: LED65.2 LED66.4 | length 300.4
  Top Layer w15: LED66.4@9902.6,13094.58 9968.58,13094.58 10055.95,13181.95 LED65.2@10055.95,13292.85
LED66_2: LED66.2 LED67.4 | length 300.5
  Top Layer w15: LED67.4@9631.15,13093.15 9697.15,13093.15 9784.5,13180.5 LED66.2@9784.5,13291.43
LED67_2: LED67.2 LED68.4 | length 301.6
  Top Layer w15: LED68.4@9359.7,13093.15 9430.15,13093.15 9513.05,13176.05 LED67.2@9513.05,13290
LED68_2: LED68.2 LED69.4 | length 291.9
  Top Layer w15: LED69.4@9088.25,13093.15 9142.15,13093.15 9241.6,13192.6 LED68.2@9241.6,13290
LED69_2: LED69.2 LED70.4 | length 298.7
  Top Layer w15: LED70.4@8816.79,13093.15 8882.26,13093.15 8970.15,13181.04 LED69.2@8970.15,13290
LED70_2: LED70.2 LED71.4 | length 298.3
  Top Layer w15: LED71.4@8545.34,13093.15 8610.15,13093.15 8698.69,13181.69 LED70.2@8698.69,13290
LED71_2: LED71.2 LED72.4 | length 298
  Top Layer w15: LED72.4@8273.89,13093.15 8338.15,13093.15 8427.24,13182.24 LED71.2@8427.24,13290
LED72_2: LED72.2 LED73.4 | length 298
  Top Layer w15: LED73.4@8002.44,13093.15 8066.7,13093.15 8155.79,13182.24 LED72.2@8155.79,13290
LED73_2: LED73.2 LED74.4 | length 294.4
  Top Layer w15: LED74.4@7730.99,13093.15 7789.15,13093.15 7884.34,13188.34 LED73.2@7884.34,13290
LED74_2: LED74.2 LED75.4 | length 291.8
  Top Layer w15: LED75.4@7459.54,13093.15 7513.15,13093.15 7612.89,13192.89 LED74.2@7612.89,13290
LED75_2: LED75.2 LED76.4 | length 296.7
  Top Layer w15: LED76.4@7188.09,13093.15 7250.15,13093.15 7341.44,13184.44 LED75.2@7341.44,13290
LED76_2: LED76.2 LED77.4 | length 298.7
  Top Layer w15: LED77.4@6916.63,13093.15 6982.15,13093.15 7069.99,13180.99 LED76.2@7069.99,13290
LED77_2: LED77.2 LED78.4 | length 297.3
  Top Layer w15: LED78.4@6645.18,13093.15 6708.15,13093.15 6798.53,13183.53 LED77.2@6798.53,13290
LED78_2: LED78.2 LED79.4 | length 299.9
  Top Layer w15: LED79.4@6373.73,13093.15 6441.15,13093.15 6527.08,13179.08 LED78.2@6527.08,13290
LED79_2: LED79.2 LED80.4 | length 300.1
  Top Layer w15: LED80.4@6102.28,13093.15 6170.15,13093.15 6255.63,13178.63 LED79.2@6255.63,13290
LED81_2: LED81.2 LED82.4 | length 300.7
  Top Layer w15: LED82.4@5559.38,13093.15 5628.15,13093.15 5712.73,13177.73 LED81.2@5712.73,13290
LED81_4: LED80.2 LED81.4 | length 300.4
  Top Layer w15: LED81.4@5830.83,13093.15 5899.15,13093.15 5984.18,13178.18 LED80.2@5984.18,13290
LED82_2: LED82.2 LED83.4 | length 299.2
  Top Layer w15: LED83.4@5287.93,13093.15 5354.15,13093.15 5441.28,13180.28 LED82.2@5441.28,13290
LED83_2: LED83.2 LED84.4 | length 301.8
  Top Layer w15: LED84.4@5016.47,13093.15 5087.15,13093.15 5169.82,13175.83 LED83.2@5169.82,13290
LED84_2: LED84.2 LED85.4 | length 299.9
  Top Layer w15: LED85.4@4745.02,13093.15 4812.57,13093.15 4898.37,13178.95 LED84.2@4898.37,13290
LED85_2: LED85.2 LED86.4 | length 294.1
  Top Layer w15: LED86.4@4473.57,13093.15 4531.15,13093.15 4626.92,13188.92 LED85.2@4626.92,13290
LED86_2: LED86.2 LED87.4 | length 301.4
  Top Layer w15: LED87.4@4202.12,13093.15 4272.15,13093.15 4355.47,13176.47 LED86.2@4355.47,13290
LED87_2: LED87.2 LED88.4 | length 297.9
  Top Layer w15: LED88.4@3930.67,13093.15 3994.7,13093.15 4084.02,13182.46 LED87.2@4084.02,13290
LED88_2: LED88.2 LED89.4 | length 297.8
  Top Layer w15: LED89.4@3659.22,13093.15 3723.15,13093.15 3812.57,13182.57 LED88.2@3812.57,13290
LED89_2: LED89.2 LED90.4 | length 290.5
  Top Layer w15: LED90.4@3387.76,13093.15 3439.15,13093.15 3541.12,13195.12 LED89.2@3541.12,13290
LED90_2: LED90.2 LED91.4 | length 296
  Top Layer w15: LED91.4@3116.31,13093.15 3177.15,13093.15 3269.66,13185.66 LED90.2@3269.66,13290
LED91_2: LED91.2 LED92.4 | length 297.4
  Top Layer w15: LED92.4@2844.86,13093.15 2908.15,13093.15 2998.21,13183.21 LED91.2@2998.21,13290
LED92_2: LED92.2 LED93.4 | length 295.9
  Top Layer w15: LED93.4@2573.41,13093.15 2634.15,13093.15 2726.76,13185.76 LED92.2@2726.76,13290
LED93_2: LED93.2 LED94.4 | length 302.7
  Top Layer w15: LED94.4@2301.96,13093.15 2374.15,13093.15 2455.31,13174.31 LED93.2@2455.31,13290
LED94_2: LED94.2 LED95.4 | length 298
  Top Layer w15: LED95.4@2030.51,13093.15 2094.7,13093.15 2183.86,13182.3 LED94.2@2183.86,13290
LED95_2: LED95.2 LED96.4 | length 303.8
  Top Layer w15: LED96.4@1759.06,13093.15 1833.15,13093.15 1912.41,13172.41 LED95.2@1912.41,13290
LED96_2: LED96.2 LED97.4 | length 315.4
  Top Layer w15: LED97.4@1640.95,13014.28 1593,13062.23 1593,13127 1640.96,13174.96 LED96.2@1640.96,13290
LED97_2: LED97.2 LED98.4 | length 299.6
  Top Layer w15: LED97.2@1759.05,12817.43 1826.33,12817.43 1915,12906.1 LED98.4@1915,13013
LED98_2: LED98.2 LED99.4 | length 302.4
  Top Layer w15: LED98.2@2033.1,12816.15 2097.15,12816.15 2183.85,12902.85 LED99.4@2183.85,13018.57
LED99_2: LED99.2 LED100.4 | length 304.8
  Top Layer w15: LED99.2@2301.95,12821.72 2377.72,12821.72 2455.3,12899.3 LED100.4@2455.3,13018.57
LED100_2: LED100.2 LED101.4 | length 298.6
  Top Layer w15: LED100.2@2573.4,12821.72 2638.72,12821.72 2726.75,12909.75 LED101.4@2726.75,13018.57
LED101_2: LED101.2 LED102.4 | length 306
  Top Layer w15: LED101.2@2844.85,12821.72 2922.68,12821.72 2998.21,12897.24 LED102.4@2998.21,13018.57
LED102_2: LED102.2 LED103.4 | length 302.2
  Top Layer w15: LED102.2@3116.31,12821.72 3187.72,12821.72 3269.66,12903.66 LED103.4@3269.66,13018.57
LED103_2: LED103.2 LED104.4 | length 304.9
  Top Layer w15: LED103.2@3387.76,12821.72 3463.72,12821.72 3541.11,12899.11 LED104.4@3541.11,13018.57
LED104_2: LED104.2 LED105.4 | length 304
  Top Layer w15: LED104.2@3659.21,12821.72 3733.72,12821.72 3812.56,12900.56 LED105.4@3812.56,13018.57
LED105_2: LED105.2 LED106.4 | length 301.4
  Top Layer w15: LED105.2@3930.66,12821.72 4000.72,12821.72 4084.01,12905.01 LED106.4@4084.01,13018.57
LED106_2: LED106.2 LED107.4 | length 303.5
  Top Layer w15: LED106.2@4202.11,12821.72 4275.72,12821.72 4355.46,12901.46 LED107.4@4355.46,13018.57
LED107_2: LED107.2 LED108.4 | length 305
  Top Layer w15: LED107.2@4473.56,12821.72 4549.72,12821.72 4626.91,12898.91 LED108.4@4626.91,13018.57
LED108_2: LED108.2 LED109.4 | length 304.1
  Top Layer w15: LED108.2@4745.01,12821.72 4819.72,12821.72 4898.37,12900.37 LED109.4@4898.37,13018.57
LED109_2: LED109.2 LED110.4 | length 305
  Top Layer w15: LED109.2@5016.47,12821.72 5092.72,12821.72 5169.82,12898.82 LED110.4@5169.82,13018.57
LED110_2: LED110.2 LED111.4 | length 305.4
  Top Layer w15: LED110.2@5287.92,12821.72 5364.72,12821.72 5441.27,12898.27 LED111.4@5441.27,13018.57
LED111_2: LED111.2 LED112.4 | length 303.3
  Top Layer w15: LED111.2@5559.37,12821.72 5632.72,12821.72 5712.72,12901.72 LED112.4@5712.72,13018.57
LED112_2: LED112.2 LED113.4 | length 306.6
  Top Layer w15: LED112.2@5830.82,12821.72 5909.72,12821.72 5984.17,12896.17 LED113.4@5984.17,13018.57
LED113_2: LED113.2 LED114.4 | length 305.7
  Top Layer w15: LED113.2@6102.27,12821.72 6179.72,12821.72 6255.62,12897.62 LED114.4@6255.62,13018.57
LED114_2: LED114.2 LED115.4 | length 307.2
  Top Layer w15: LED114.2@6373.72,12821.72 6453.72,12821.72 6527.07,12895.08 LED115.4@6527.07,13018.57
LED115_2: LED115.2 LED116.4 | length 307
  Top Layer w15: LED115.2@6645.18,12821.72 6724.72,12821.72 6798.53,12895.53 LED116.4@6798.53,13018.57
LED116_2: LED116.2 LED117.4 | length 304.4
  Top Layer w15: LED116.2@6916.63,12821.72 6991.72,12821.72 7069.98,12899.98 LED117.4@7069.98,13018.57
LED117_2: LED117.2 LED118.4 | length 306.4
  Top Layer w15: LED117.2@7188.08,12821.72 7266.72,12821.72 7341.43,12896.43 LED118.4@7341.43,13018.57
LED118_2: LED118.2 LED119.4 | length 302.7
  Top Layer w15: LED118.2@7459.53,12821.72 7531.72,12821.72 7612.88,12902.88 LED119.4@7612.88,13018.57
LED119_2: LED119.2 LED120.4 | length 305.9
  Top Layer w15: LED119.2@7730.98,12821.72 7808.72,12821.72 7884.33,12897.33 LED120.4@7884.33,13018.57
LED120_2: LED120.2 LED121.4 | length 301.5
  Top Layer w15: LED120.2@8002.43,12821.72 8072.72,12821.72 8155.78,12904.78 LED121.4@8155.78,13018.57
LED121_2: LED121.2 LED122.4 | length 306.6
  Top Layer w15: LED121.2@8273.88,12821.72 8352.72,12821.72 8427.24,12896.24 LED122.4@8427.24,13018.57
LED122_2: LED122.2 LED123.4 | length 305.1
  Top Layer w15: LED122.2@8545.34,12821.72 8621.72,12821.72 8698.69,12898.69 LED123.4@8698.69,13018.57
LED123_2: LED123.2 LED124.4 | length 303.1
  Top Layer w15: LED123.2@8816.79,12821.72 8889.72,12821.72 8970.14,12902.14 LED124.4@8970.14,13018.57
LED124_2: LED124.2 LED125.4 | length 305.2
  Top Layer w15: LED124.2@9088.24,12821.72 9164.72,12821.72 9241.59,12898.59 LED125.4@9241.59,13018.57
LED125_2: LED125.2 LED126.4 | length 304.9
  Top Layer w15: LED125.2@9359.69,12821.72 9435.72,12821.72 9513.04,12899.04 LED126.4@9513.04,13018.57
LED126_2: LED126.2 LED127.4 | length 303.5
  Top Layer w15: LED126.2@9631.14,12821.72 9704.72,12821.72 9784.49,12901.49 LED127.4@9784.49,13018.57
LED127_2: LED127.2 LED128.4 | length 304.4
  Top Layer w15: LED127.2@9902.59,12821.72 9977.72,12821.72 10055.94,12899.94 LED128.4@10055.94,13018.57
LED128_2: LED128.2 LED129.4 | length 316.6
  Top Layer w15: LED129.4@10174.05,12542.4 10219,12587.34 10219,12776.76 LED128.2@10174.04,12821.72
LED129_2: LED129.2 LED130.4 | length 303.6
  Top Layer w15: LED130.4@9902.6,12539.54 9971.54,12539.54 10055.95,12623.95 LED129.2@10055.95,12739.25
LED130_2: LED130.2 LED131.4 | length 304.2
  Top Layer w15: LED131.4@9631.15,12541.68 9709.68,12541.68 9784.5,12616.5 LED130.2@9784.5,12736.39
LED131_2: LED131.2 LED132.4 | length 303.1
  Top Layer w15: LED132.4@9359.7,12541.68 9432.68,12541.68 9513.05,12622.05 LED131.2@9513.05,12738.53
LED132_2: LED132.2 LED133.4 | length 305.7
  Top Layer w15: LED133.4@9088.25,12541.68 9165.68,12541.68 9241.6,12617.6 LED132.2@9241.6,12738.53
LED133_2: LED133.2 LED134.4 | length 303.8
  Top Layer w15: LED134.4@8816.79,12541.68 8890.86,12541.68 8970.15,12620.96 LED133.2@8970.15,12738.53
LED134_2: LED134.2 LED135.4 | length 301.6
  Top Layer w15: LED135.4@8545.34,12541.68 8615.68,12541.68 8698.69,12624.69 LED134.2@8698.69,12738.53
LED135_2: LED135.2 LED136.4 | length 307.7
  Top Layer w15: LED136.4@8273.89,12541.68 8354.68,12541.68 8427.24,12614.24 LED135.2@8427.24,12738.53
LED136_2: LED136.2 LED137.4 | length 302.1
  Top Layer w15: LED137.4@8002.44,12541.68 8073.68,12541.68 8155.79,12623.79 LED136.2@8155.79,12738.53
LED137_2: LED137.2 LED138.4 | length 302.4
  Top Layer w15: LED138.4@7730.99,12541.68 7802.68,12541.68 7884.34,12623.34 LED137.2@7884.34,12738.53
LED138_2: LED138.2 LED139.4 | length 299.7
  Top Layer w15: LED139.4@7459.54,12541.68 7526.68,12541.68 7612.89,12627.89 LED138.2@7612.89,12738.53
LED139_2: LED139.2 LED140.4 | length 302.3
  Top Layer w15: LED140.4@7188.09,12541.68 7259.68,12541.68 7341.44,12623.44 LED139.2@7341.44,12738.53
LED140_2: LED140.2 LED141.4 | length 306.1
  Top Layer w15: LED141.4@6916.63,12541.68 6994.68,12541.68 7069.99,12616.99 LED140.2@7069.99,12738.53
LED141_2: LED141.2 LED142.4 | length 303.4
  Top Layer w15: LED142.4@6645.18,12541.68 6718.68,12541.68 6798.53,12621.53 LED141.2@6798.53,12738.53
LED142_2: LED142.2 LED143.4 | length 301.9
  Top Layer w15: LED143.4@6373.73,12541.68 6444.68,12541.68 6527.08,12624.08 LED142.2@6527.08,12738.53
LED143_2: LED143.2 LED144.4 | length 301.6
  Top Layer w15: LED144.4@6102.28,12541.68 6172.68,12541.68 6255.63,12624.63 LED143.2@6255.63,12738.53
LED144_2: LED144.2 LED145.4 | length 300.7
  Top Layer w15: LED145.4@5830.83,12541.68 5899.68,12541.68 5984.18,12626.18 LED144.2@5984.18,12738.53
LED145_2: LED145.2 LED146.4 | length 303.9
  Top Layer w15: LED146.4@5559.38,12541.68 5633.68,12541.68 5712.73,12620.73 LED145.2@5712.73,12738.53
LED146_2: LED146.2 LED147.4 | length 301.2
  Top Layer w15: LED147.4@5287.93,12541.68 5357.68,12541.68 5441.28,12625.28 LED146.2@5441.28,12738.53
LED147_2: LED147.2 LED148.4 | length 301.5
  Top Layer w15: LED148.4@5016.47,12541.68 5086.68,12541.68 5169.82,12624.83 LED147.2@5169.82,12738.53
LED148_2: LED148.2 LED149.4 | length 300.6
  Top Layer w15: LED149.4@4745.02,12541.68 4813.68,12541.68 4898.37,12626.37 LED148.2@4898.37,12738.53